# EAGLE board LEDadapter00 (EAGLE 7.7.0)
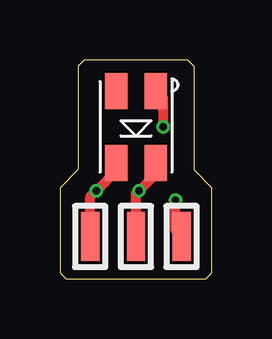
[diagram p0: board, top side]
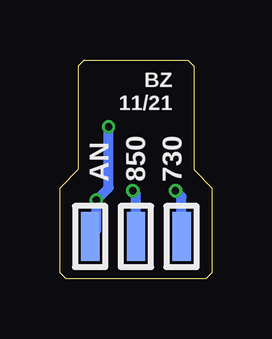
[diagram p1: board, bottom side, seen from below]

Size 6.35 x 9.14 mm. Coordinates in mm from the lower left corner, seen from the top.
Outline: 0.25,0 6.1,0 6.35,0.25 6.35,3.81 5.59,4.57 5.59,8.89 5.33,9.14 1.02,9.14 0.76,8.89 0.76,4.57 0,3.81 0,0.25 0.25,0
Copper layers (1*16): Top 0.035559375mm / dielectric 1.6mm / Bottom 0.035559375mm
Design rules "oshpark-2layer *": minimum track width 6mil, minimum drill 10mil, track to track 6mil, track to pad 6mil, pad to pad 6mil, via to via 6mil, smd to smd 6mil, copper to edge 15mil, drill to drill 6mil, minimum pad ring 5mil, minimum via ring 5mil, stop-mask expansion 2.5mil, vias tented up to drill 15mil, thermal gap 10mil

## Footprints (pad centres in the part's own frame; a part is rotated, then mirrored left to right if it is on the bottom)
SMT730D_850D = smd 0.95 x 1.5: A 0.825,1.5; C7 -0.825,-1.5; C8 0.825,-1.5; NC -0.825,1.5
TESTPAD_MEDIUM = smd 2.032 x 0.762: P$1 0,0

## Placement (x,y rotation side)
LED1  SMT730D_850D  [SMT730D_850D]  3.17,6.35 0 top
TP1  TESTPOINT_PADMEDIUM  [TESTPAD_MEDIUM]  1.27,1.78 90 top
TP2  TESTPOINT_PADMEDIUM  [TESTPAD_MEDIUM]  3.17,1.78 90 top
TP3  TESTPOINT_PADMEDIUM  [TESTPAD_MEDIUM]  5.08,1.78 90 top
TP4  TESTPOINT_PADMEDIUM  [TESTPAD_MEDIUM]  5.08,1.78 270 bottom
TP5  TESTPOINT_PADMEDIUM  [TESTPAD_MEDIUM]  3.17,1.78 270 bottom
TP6  TESTPOINT_PADMEDIUM  [TESTPAD_MEDIUM]  1.27,1.78 270 bottom

## Library data of the parts
LED1 TP1-TP6 = MyLib

## Nets
730: LED1.C7 TP1.P$1 TP6.P$1
850: LED1.C8 TP2.P$1 TP5.P$1
AN: LED1.A TP3.P$1 TP4.P$1

## Tracks (layer width: path | path; a pad name or v marks a point on that pad's centre or on a via)
730  (via drill 0.3)
  Top 0.406: LED1.C7 2.35,4.51 v1.52,3.68 1.27,3.43 TP6.P$1
  Bottom 0.406: TP6.P$1 1.27,3.43 v1.52,3.68
850  (via drill 0.3)
  Top 0.406: LED1.C8 4,4.38 v3.3,3.68 3.17,3.56 TP5.P$1
  Bottom 0.406: TP5.P$1 3.17,3.56 v3.3,3.68
AN  (via drill 0.3)
  Top 0.406: TP4.P$1 4.83,2.03 v4.83,3.3 | v4.32,6.35 4.32,7.53 LED1.A
  Bottom 0.406: v4.32,6.35 4.32,3.81 v4.83,3.3 4.83,2.03 TP4.P$1

## Text on the board
bPlace: BZ / 11/21 | 730 | 850 | AN